# EAGLE board stepper-motor-driver (EAGLE 4.16)
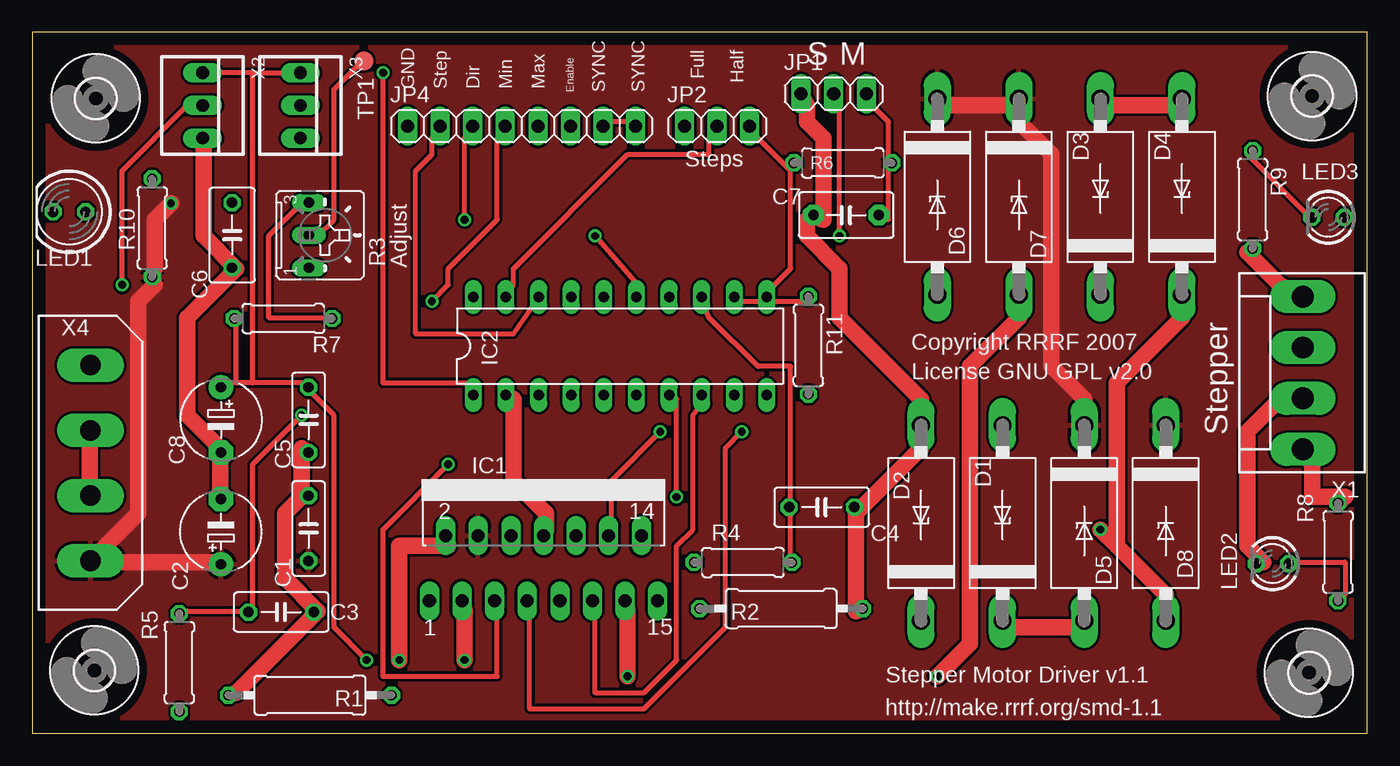
[diagram p0: board, top side]
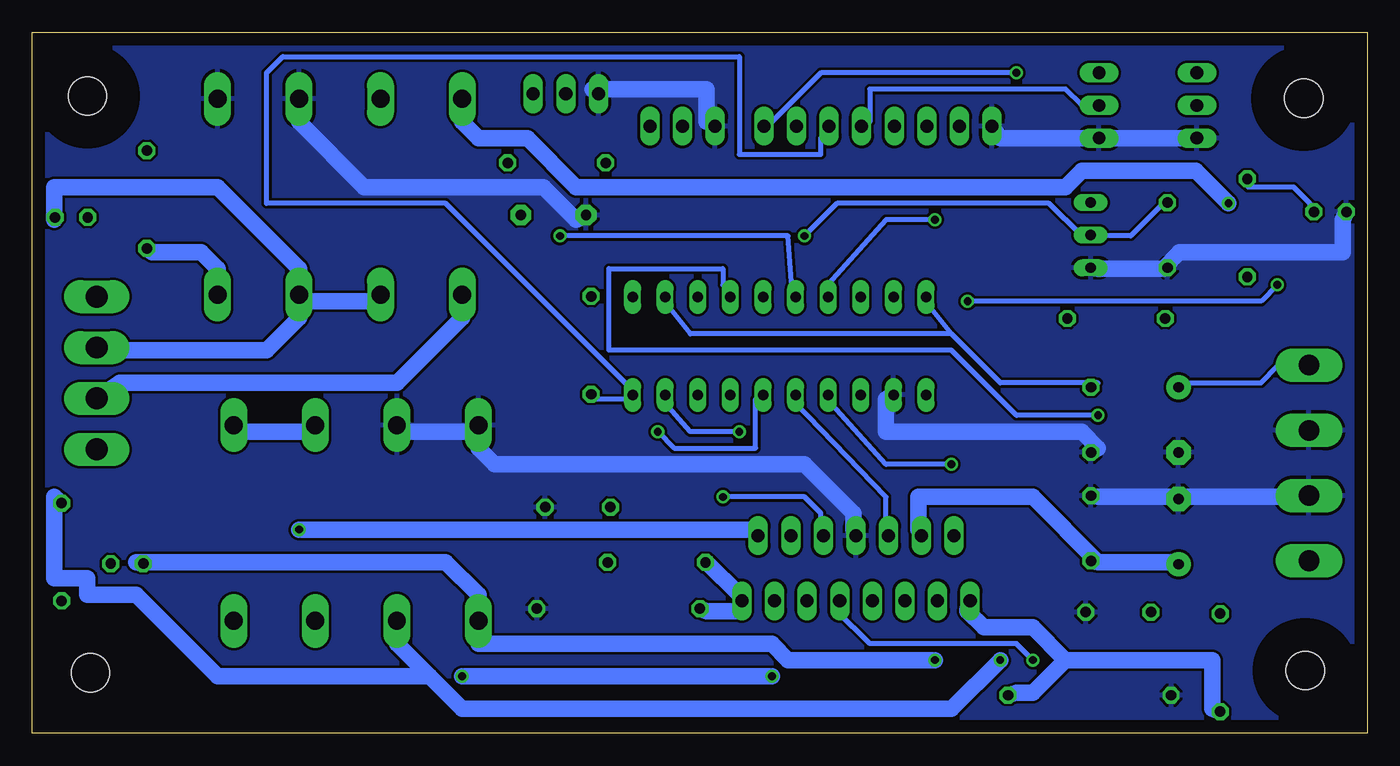
[diagram p1: board, bottom side, seen from below]

Size 104 x 54.6 mm. Coordinates in mm from the lower left corner, seen from the top.
Outline: 0,0 104,0 104,54.6 0,54.6 0,0
Copper layers (1*16): Top 0.035mm / dielectric 1.5mm / Bottom 0.035mm
Design rules "default": minimum track width 10mil, minimum drill 24mil, track to track 8mil, track to pad 8mil, pad to pad 8mil, via to via 8mil, smd to smd 8mil, copper to edge 40mil, drill to drill 8mil, minimum pad ring 10mil, minimum via ring 8mil, stop-mask expansion 4mil, vias tented up to drill 0mil, thermal gap 10mil
Net classes: 0 default: width 0.406 mm, drill 0.381 mm; 1 Power: width 1.27 mm, drill 0.381 mm; 2 Signal: width 0.406 mm, drill 0.381 mm; 3 Ground: width 1.27 mm, drill 0.381 mm

## Footprints (pad centres in the part's own frame; a part is rotated, then mirrored left to right if it is on the bottom)
C050-025X075 = drill 0.813 octagon: 1 -2.54,0; 2 2.54,0
E5-6 = drill 0.813 pad 1.905 round: + -2.54,0 | drill 0.813 pad 1.905 octagon: - 2.54,0
C050-030X075 = drill 0.813 octagon: 1 -2.54,0; 2 2.54,0
C050-035X075 = drill 0.813 octagon: 1 -2.54,0; 2 2.54,0
C5B3.5 = drill 0.813 pad 1.6 octagon: 1 -2.54,0; 2 2.54,0
CB429-15 = drill 1.397 long: A 7.62,0; C -7.62,0
3,0 = hole 3: 0,0
MULTIWATT-15 = drill 1.016 long: 1 -8.89,-7.62; 2 -7.62,-2.54; 3 -6.35,-7.62; 4 -5.08,-2.54; 5 -3.81,-7.62; 6 -2.54,-2.54; 7 -1.27,-7.62; 8 0,-2.54; 9 1.27,-7.62; 10 2.54,-2.54; 11 3.81,-7.62; 12 5.08,-2.54; 13 6.35,-7.62; 14 7.62,-2.54; 15 8.89,-7.62
DIL20 = drill 0.813 long: 1 -11.43,-3.81; 2 -8.89,-3.81; 3 -6.35,-3.81; 4 -3.81,-3.81; 5 -1.27,-3.81; 6 1.27,-3.81; 7 3.81,-3.81; 8 6.35,-3.81; 9 8.89,-3.81; 10 11.43,-3.81; 11 11.43,3.81; 12 8.89,3.81; 13 6.35,3.81; 14 3.81,3.81; 15 1.27,3.81; 16 -1.27,3.81; 17 -3.81,3.81; 18 -6.35,3.81; 19 -8.89,3.81; 20 -11.43,3.81
1X03 = drill 1.016 long: 1 -2.54,0; 2 0,0; 3 2.54,0
1X08 = drill 1.016 long: 1 -8.89,0; 2 -6.35,0; 3 -3.81,0; 4 -1.27,0; 5 1.27,0; 6 3.81,0; 7 6.35,0; 8 8.89,0
LED5MM = drill 0.813 octagon: A -1.27,0; K 1.27,0
LED3MM = drill 0.813 octagon: A -1.27,0; K 1.27,0
0309/12 = drill 0.813 octagon: 1 -6.35,0; 2 6.35,0
B25U = drill 0.813 long: A 2.54,-0.889; E -2.54,-0.889; S 0,-0.889
0207/7 = drill 0.813 octagon: 1 -3.81,0; 2 3.81,0
TP15R = smd 1.5 x 1.5: TP 0,0
KK-156-4 = drill 1.7 pad 2.184 long: 1 -5.94,0; 2 -1.98,0; 3 1.98,0; 4 5.94,0
22-23-2031 = drill 1 long: 1 -2.54,0; 2 0,0; 3 2.54,0
9090-4V = drill 1.6 pad 2.6 long: 1 -7.62,0; 2 -2.54,0; 3 2.54,0; 4 7.62,0

## Placement (x,y rotation side)
C1  100nf  [C050-025X075]  21.54,15.96 270 top
C2  100uF  [E5-6]  14.71,15.71 90 top
C3  1n  [C050-030X075]  19.4,9.45 180 top
C4  1n  [C050-030X075]  61.5,17.61 180 top
C5  100nf  [C050-025X075]  21.54,24.41 90 top
C6  100nf  [C050-035X075]  15.57,38.79 270 top
C7  3.3 nF  [C5B3.5]  63.4,40.35 180 top
C8  100uF  [E5-6]  14.71,24.41 270 top
D1  UF5404  [CB429-15]  75.59,16.38 90 top
D2  UF5404  [CB429-15]  69.24,16.38 90 top
D3  UF5404  [CB429-15]  83.21,41.78 90 top
D4  UF5404  [CB429-15]  89.56,41.78 90 top
D5  UF5404  [CB429-15]  81.94,16.38 270 top
D6  UF5404  [CB429-15]  70.51,41.78 270 top
D7  UF5404  [CB429-15]  76.86,41.78 270 top
D8  UF5404  [CB429-15]  88.29,16.38 270 top
H1  MOUNT-HOLE3.0  [3,0]  99.45,4.73 0 top
H2  MOUNT-HOLE3.0  [3,0]  99.69,49.62 0 top
H3  MOUNT-HOLE3.0  [3,0]  4.85,4.9 0 top
H4  MOUNT-HOLE3.0  [3,0]  4.96,49.44 0 top
IC1  L298  [MULTIWATT-15]  39.83,17.94 0 top
IC2  L297  [DIL20]  45.8,30.16 0 top
JP1  [1X03]  62.43,49.8 0 top
JP2  [1X03]  53.35,47.28 0 top
JP4  [1X08]  38.12,47.28 0 top
LED1  [LED5MM]  2.9,40.61 180 top
LED2  [LED3MM]  96.61,13.21 180 top
LED3  [LED3MM]  100.94,40.18 180 top
R1  0.5  [0309/12]  21.64,2.97 0 top
R2  0.5  [0309/12]  58.34,9.72 180 top
R3  2K  [B25U]  22.43,38.79 270 top
R4  4K7  [0207/7]  55.36,13.31 0 top
R5  4K7  [0207/7]  11.46,5.51 270 top
R6  22K  [0207/7]  63.14,44.41 180 top
R7  2K7  [0207/7]  19.56,32.3 180 top
R8  560  [0207/7]  101.71,14.12 270 top
R9  560  [0207/7]  95.06,41.57 270 top
R10  560  [0207/7]  9.35,39.36 270 top
R11  100K  [0207/7]  60.46,30.21 270 top
TP1  PTR1TP15R  [TP15R]  25.83,52.36 270 top
X1  [KK-156-4]  98.96,28.06 90 top
X2  Min  [22-23-2031]  13.28,48.89 270 top
X3  Max  [22-23-2031]  20.9,48.89 270 top
X4  9090-4V  [9090-4V]  4.55,21.06 270 top

## Library data of the parts
C1-C6 C8 R1 R2 R4-R11 = rcl
C7 = capacitor-wima
D1-D8 = diode
H1-H4 = holes
IC1 IC2 = st-microelectronics
JP1 JP2 JP4 = pinhead
LED1-LED3 = led
R3 = pot
TP1 = testpad
X1-X3 = con-molex
X4 = con-thomas-betts

## Nets
DIR: IC2.17 JP4.3
ENABLE: IC2.10 JP4.6 R11.2
GND [Ground]: C1.1 C2.- C3.1 C4.1 C5.1 C6.2 C7.2 C8.- D1.A D2.A D3.A D4.A IC1.8 IC2.2 JP1.1 JP2.1 JP4.1 LED1.K R1.1 R2.1 R3.A X2.3 X3.3 X4.2 X4.3
MAX: JP4.5 X3.2
MIN: JP4.4 X2.2
N$1: R3.E R7.1
N$2: LED3.K R9.1
N$3: LED2.A R8.2
N$4: LED1.A R10.1
N$25: IC1.5 IC2.4
N$26: IC1.7 IC2.6
N$27 [Power]: D4.C D8.A IC1.14 R9.2 X1.4
N$28 [Power]: D3.C D7.A IC1.13 LED3.A X1.3
N$29 [Power]: D2.C D6.A IC1.3 LED2.K X1.2
N$30 [Power]: D1.C D5.A IC1.2 R8.1 X1.1
N$31: IC1.10 IC2.7
N$32 [Power]: IC1.15 R2.2 R4.1
N$33 [Power]: IC1.1 R1.2 R5.2
N$34: IC1.12 IC2.9
N$36: C4.2 IC2.13 R4.2
N$37: C3.2 IC2.14 R5.1
N$41: C7.1 JP1.3 R6.1
ON_A: IC1.6 IC2.5
ON_B: IC1.11 IC2.8
OSC: IC2.16 JP1.2
STEP: IC2.18 JP4.2
STEP_SEL: IC2.19 JP2.2
SYNC: IC2.1 JP4.7 JP4.8
VCC: C5.2 C8.+ IC1.9 IC2.11 IC2.12 IC2.20 JP2.3 R6.2 R7.2 R11.1 X2.1 X3.1 X4.1
VREF: C6.1 IC2.15 R3.S TP1.TP
VSS [Power]: C1.2 C2.+ D5.C D6.C D7.C D8.C IC1.4 R10.2 X4.4

## Tracks (layer width: path | path; a pad name or v marks a point on that pad's centre or on a via)
DIR  (via drill 0.61)
  Top 0.406: v33.68,40 33.68,46.35 JP4.3
  Bottom 0.406: v33.68,40 37.49,40 42.06,34.92 IC2.17
ENABLE
  Bottom 0.406: R11.2 60.35,26.03 57.81,26.03 IC2.10 57.81,27.3 71.78,41.27 85.75,41.27 85.75,51.43 84.48,52.7 48.92,52.7 48.92,45.08 42.57,45.08 42.57,46.35 JP4.6
GND
  Top 1.27: 64.16,17.14 69.24,22.22 D2.A 69.24,26.03 62.89,32.38 62.89,36.19 60.35,38.73 60.35,40 C7.2 61.62,40 61.62,46.35 60.35,47.62 60.35,48.89 JP1.1 | 64.16,17.14 64.16,9.52 R2.1 | 64.16,17.14 C4.1 | D3.A 83.21,48.89 89.56,48.89 D4.A | 15.9,36.19 13.36,38.73 13.36,46.35 X2.3 | IC2.2 37.49,26.03 37.49,19.68 40.03,17.14 40.03,15.87 IC1.8 | 22.25,9.52 15.9,3.17 R1.1 | X4.3 4.47,19.68 4.47,23.49 X4.2 | 20.98,18.41 20.98,22.22 C5.1 | C2.- 14.63,18.41 14.63,20.95 C8.- 14.63,22.22 12.09,24.76 12.09,32.38 15.9,36.19 | 22.25,9.52 19.71,12.06 19.71,17.14 20.98,18.41 | 22.25,9.52 C3.1 | 20.98,18.41 C1.1 | 15.9,36.19 C6.2
  Bottom 1.27: D1.A 75.59,23.49 69.24,23.49 D2.A 69.24,22.22 67.97,20.95 43.84,20.95 40.03,17.14 40.03,15.87 IC1.8 | JP2.1 51.46,47.62 51.46,50.16 60.35,50.16 JP1.1 | D3.A 83.21,47.62 78.13,42.54 64.16,42.54 61.62,40 C7.2 | X2.3 X3.3 28.6,46.35 JP4.1 | 15.9,36.19 20.98,36.19 R3.A | 15.9,36.19 14.63,37.46 1.93,37.46 1.93,40 LED1.K | C6.2 15.9,36.19 | 14.63,18.41 20.98,18.41 C1.1 | 14.63,18.41 7.01,18.41 X4.3 | 14.63,18.41 C2.- | IC2.2 37.49,26.03 37.49,23.49 22.25,23.49 20.98,22.22 C5.1
  pour Bottom: -0.86,55.24 104.55,55.24 104.55,-0.39 -0.86,-0.39
MAX
  Bottom 0.406: X3.2 22.25,48.89 23.52,50.16 38.76,50.16 38.76,47.62 JP4.5
MIN  (via drill 0.61)
  Top 0.406: v7.01,34.92 7.01,43.81 12.09,48.89 X2.2 | v31.14,33.65 32.41,34.92 32.41,36.19 36.22,40 36.22,46.35 JP4.4
  Bottom 0.406: v7.01,34.92 8.28,33.65 v31.14,33.65
N$1
  Top 0.406: R7.1 23.52,32.38 18.44,32.38 18.44,38.73 20.98,41.27 R3.E
N$2
  Top 0.406: LED3.K 99.72,40 94.64,45.08 R9.1
N$3
  Top 0.406: LED2.A 98.45,13.33 102.26,13.33 102.26,10.79 R8.2
N$4
  Bottom 0.406: LED1.A 4.47,41.27 5.74,42.54 9.3,42.54 R10.1
N$25  (via drill 0.61)
  Top 0.406: v32.41,20.95 27.33,15.87 27.33,4.44 36.22,4.44 36.22,9.52 IC1.5
  Bottom 0.406: v32.41,20.95 37.49,20.95 42.06,26.03 IC2.4
N$26  (via drill 0.61)
  Top 0.406: v55.27,23.49 54,22.22 54,8.25 47.65,1.9 38.76,1.9 38.76,9.52 IC1.7
  Bottom 0.406: v55.27,23.49 54,22.22 47.65,22.22 47.65,26.03 IC2.6
N$27  (via drill 0.61)
  Top 1.27: R9.2 94.64,37.46 97.18,34.92 X1.4 | 84.48,14.6 88.29,10.79 D8.A | v83.21,15.87 84.48,14.6 | 84.48,14.6 84.48,27.3 89.56,32.38 D4.C
  Bottom 1.27: D4.C 89.56,36.19 90.83,37.46 94.64,37.46 R9.2 | v83.21,15.87 47.65,15.87 IC1.14
N$28  (via drill 0.61)
  Top 1.27: v46.38,4.44 46.38,9.52 IC1.13 | v70.51,4.44 73.05,6.98 73.05,28.57 76.86,32.38 D7.A
  Bottom 1.27: LED3.A 102.26,40 102.26,42.54 89.56,42.54 83.21,36.19 D3.C 83.21,33.65 | X1.3 97.18,29.84 85.75,29.84 83.21,32.38 83.21,33.65 | v46.38,4.44 v70.51,4.44 | 83.21,33.65 76.86,33.65 D7.A
N$29  (via drill 0.61)
  Top 1.27: v33.68,5.71 33.68,9.52 IC1.3 | LED2.K 95.91,13.33 94.64,14.6 94.64,23.49 97.18,26.03 X1.2
  Bottom 1.27: v33.68,5.71 45.11,5.71 46.38,6.98 69.24,6.98 D2.C 69.24,10.79 71.78,13.33 95.91,13.33 LED2.K | D6.A 70.51,32.38 75.59,27.3 97.18,27.3 X1.2
N$30  (via drill 0.61)
  Top 1.27: R8.1 102.26,18.41 99.72,18.41 99.72,20.95 X1.1 | v28.6,5.71 28.6,14.6 32.41,14.6 IC1.2 | D5.A 81.94,8.25 75.59,8.25 D1.C
  Bottom 1.27: v28.6,5.71 32.41,1.9 70.51,1.9 73.05,4.44 | 73.05,4.44 75.59,6.98 D1.C | 73.05,4.44 89.56,4.44 95.91,10.79 99.72,10.79 99.72,12.06 102.26,12.06 102.26,18.41 R8.1
N$31  (via drill 0.61)
  Top 0.406: v50.19,18.41 50.19,26.03 IC2.7
  Bottom 0.406: v50.19,18.41 43.84,18.41 42.57,17.14 42.57,15.87 IC1.10
N$32
  Bottom 1.27: R2.2 51.46,9.52 48.92,9.52 IC1.15 48.92,10.79 51.46,13.33 R4.1
N$33
  Bottom 1.27: 23.52,5.71 12.09,5.71 12.09,1.9 R5.2 | 23.52,5.71 26.06,3.17 27.33,3.17 R1.2 | 23.52,5.71 26.06,8.25 29.87,8.25 31.14,9.52 IC1.1
N$34  (via drill 0.61)
  Top 0.406: v48.92,23.49 45.11,19.68 45.11,15.87 IC1.12
  Bottom 0.406: v48.92,23.49 52.73,23.49 54.76,25.78 IC2.9
N$36
  Top 0.406: 59.08,17.14 59.08,13.33 R4.2 | 59.08,17.14 59.08,28.57 56.54,28.57 52.73,32.38 52.22,33.65 IC2.13 | 59.08,17.14 C4.2
N$37  (via drill 0.61)
  Top 0.406: 17.17,9.52 12.09,9.52 R5.1 | v20.98,24.76 17.17,20.95 17.17,9.52 | 17.17,9.52 C3.2
  Bottom 0.406: v20.98,24.76 27.33,24.76 32.41,29.84 59.08,29.84 59.08,36.19 50.19,36.19 50.19,34.92 IC2.14
N$41
  Top 0.406: 66.7,43.81 66.7,40 C7.1 | 66.7,43.81 66.7,47.62 65.43,48.89 JP1.3 | 66.7,43.81 R6.1
ON_A
  Bottom 0.406: IC2.5 44.6,25.78 37.49,18.41 37.49,15.87 IC1.6
ON_B
  Top 0.406: IC2.8 52.22,25.78 51.46,24.76 51.46,15.87 50.19,14.6 50.19,5.71 47.65,3.17 43.84,3.17 43.84,9.52 IC1.11
OSC  (via drill 0.61)
  Top 0.406: v62.89,38.73 62.89,48.89 JP1.2
  Bottom 0.406: v62.89,38.73 45.11,38.73 44.86,35.17 IC2.16
STEP
  Top 0.406: IC2.18 39.27,33.65 37.49,31.11 29.87,31.11 29.87,43.81 31.14,45.08 31.14,46.35 JP4.2
STEP_SEL
  Top 0.406: IC2.19 37.49,34.92 37.49,36.19 46.38,45.08 52.73,45.08 52.73,46.35 JP2.2
SYNC  (via drill 0.61)
  Top 0.406: v27.33,51.43 27.33,27.3 34.44,27.3 IC2.1 | JP4.7 45.11,47.62 46.38,47.62 JP4.8
  Bottom 0.406: v27.33,51.43 42.57,51.43 46.38,47.62 JP4.8
VCC  (via drill 0.61)
  Top 0.406: 57.81,33.65 54.76,33.65 IC2.12 | 57.81,33.65 60.35,33.65 R11.1 | 57.81,33.65 IC2.11 57.81,34.92 59.08,36.19 59.08,43.81 | 59.08,43.81 56.54,46.35 JP2.3 | 59.08,43.81 R6.2 | 17.17,51.43 X2.1 | 17.17,51.43 X3.1 | 15.9,27.3 14.63,27.3 C8.+ | 17.17,27.3 15.9,27.3 | 20.98,27.3 17.17,27.3 | 15.9,27.3 15.9,32.38 R7.2 | v26.06,5.71 23.52,8.25 23.52,24.76 20.98,27.3 | 20.98,27.3 C5.2 | 17.17,27.3 17.17,51.43
  Bottom 0.406: 32.41,31.11 28.6,27.3 20.98,27.3 C5.2 | 32.41,31.11 34.44,33.65 IC2.20 | v26.06,5.71 27.33,6.98 38.76,6.98 41.3,9.52 IC1.9 | X4.1 7.01,28.57 8.28,27.3 14.63,27.3 C8.+ | 32.41,31.11 52.73,31.11 54.76,33.65 IC2.12
VREF  (via drill 0.61)
  Top 0.406: TP1.TP 26.06,52.7 23.52,50.16 23.52,40 22.25,38.73 R3.S | v43.84,38.73 47.14,34.92 IC2.15
  Bottom 0.406: C6.1 15.9,41.27 18.44,38.73 20.98,38.73 R3.S 22.25,38.73 24.79,41.27 41.3,41.27 v43.84,38.73
VSS  (via drill 0.61)
  Top 1.27: D6.C 70.51,48.89 76.86,48.89 D7.C 76.86,47.62 79.4,45.08 79.4,28.57 81.94,26.03 D5.C | C2.+ 14.63,13.33 7.01,13.33 X4.4 5.74,14.6 8.28,17.14 8.28,33.65 9.55,34.92 R10.2 9.55,36.19 9.55,40 v10.82,41.27
  Bottom 1.27: D5.C 81.94,23.49 88.29,23.49 D8.C | 20.98,13.33 14.63,13.33 C2.+ | 20.98,13.33 26.06,18.41 34.95,18.41 34.95,15.87 IC1.4 | 20.98,13.33 C1.2 | v10.82,41.27 13.36,43.81 22.25,43.81 23.52,42.54 61.62,42.54 65.43,46.35 69.24,46.35 70.51,47.62 D6.C
  pour Top: -0.86,55.24 104.55,55.24 104.55,-0.39 -0.86,-0.39

## Text on the board
tPlace: Full | Half | S | M | GND | Step | Dir | Min | Max | Enable | SYNC | SYNC | Steps | Adjust | Copyright RRRF 2007 | License GNU GPL v2.0 | Stepper | Stepper Motor Driver v1.1 | http://make.rrrf.org/smd-1.1